# Altium PCB Pmodkypd.PcbDoc
Units mm, origin at the board's own origin, x right, y up, seen from the top; angles counter-clockwise.
Board outline 99.69 x 68.45 mm, 2 copper layers (Top Layer, Bottom Layer); 10 components, 14 nets, 36 pads, 13 vias.
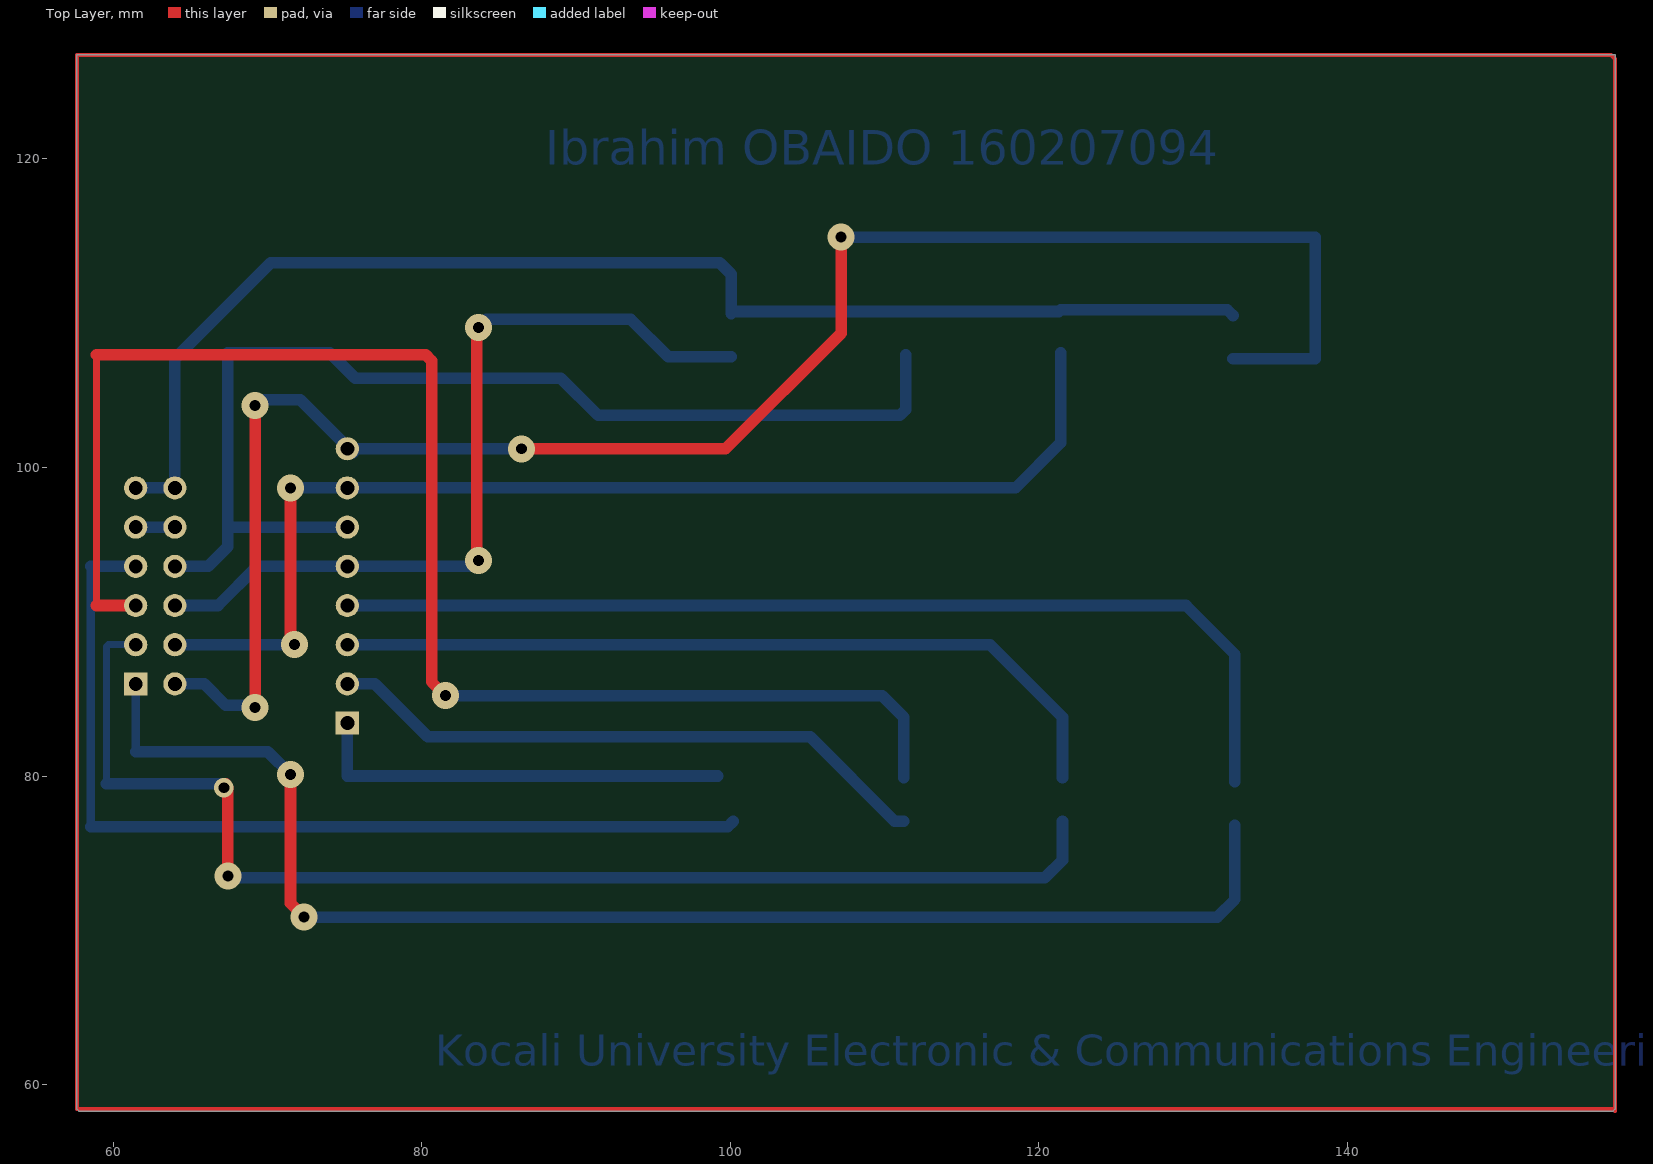
[diagram p0: Top Layer view]
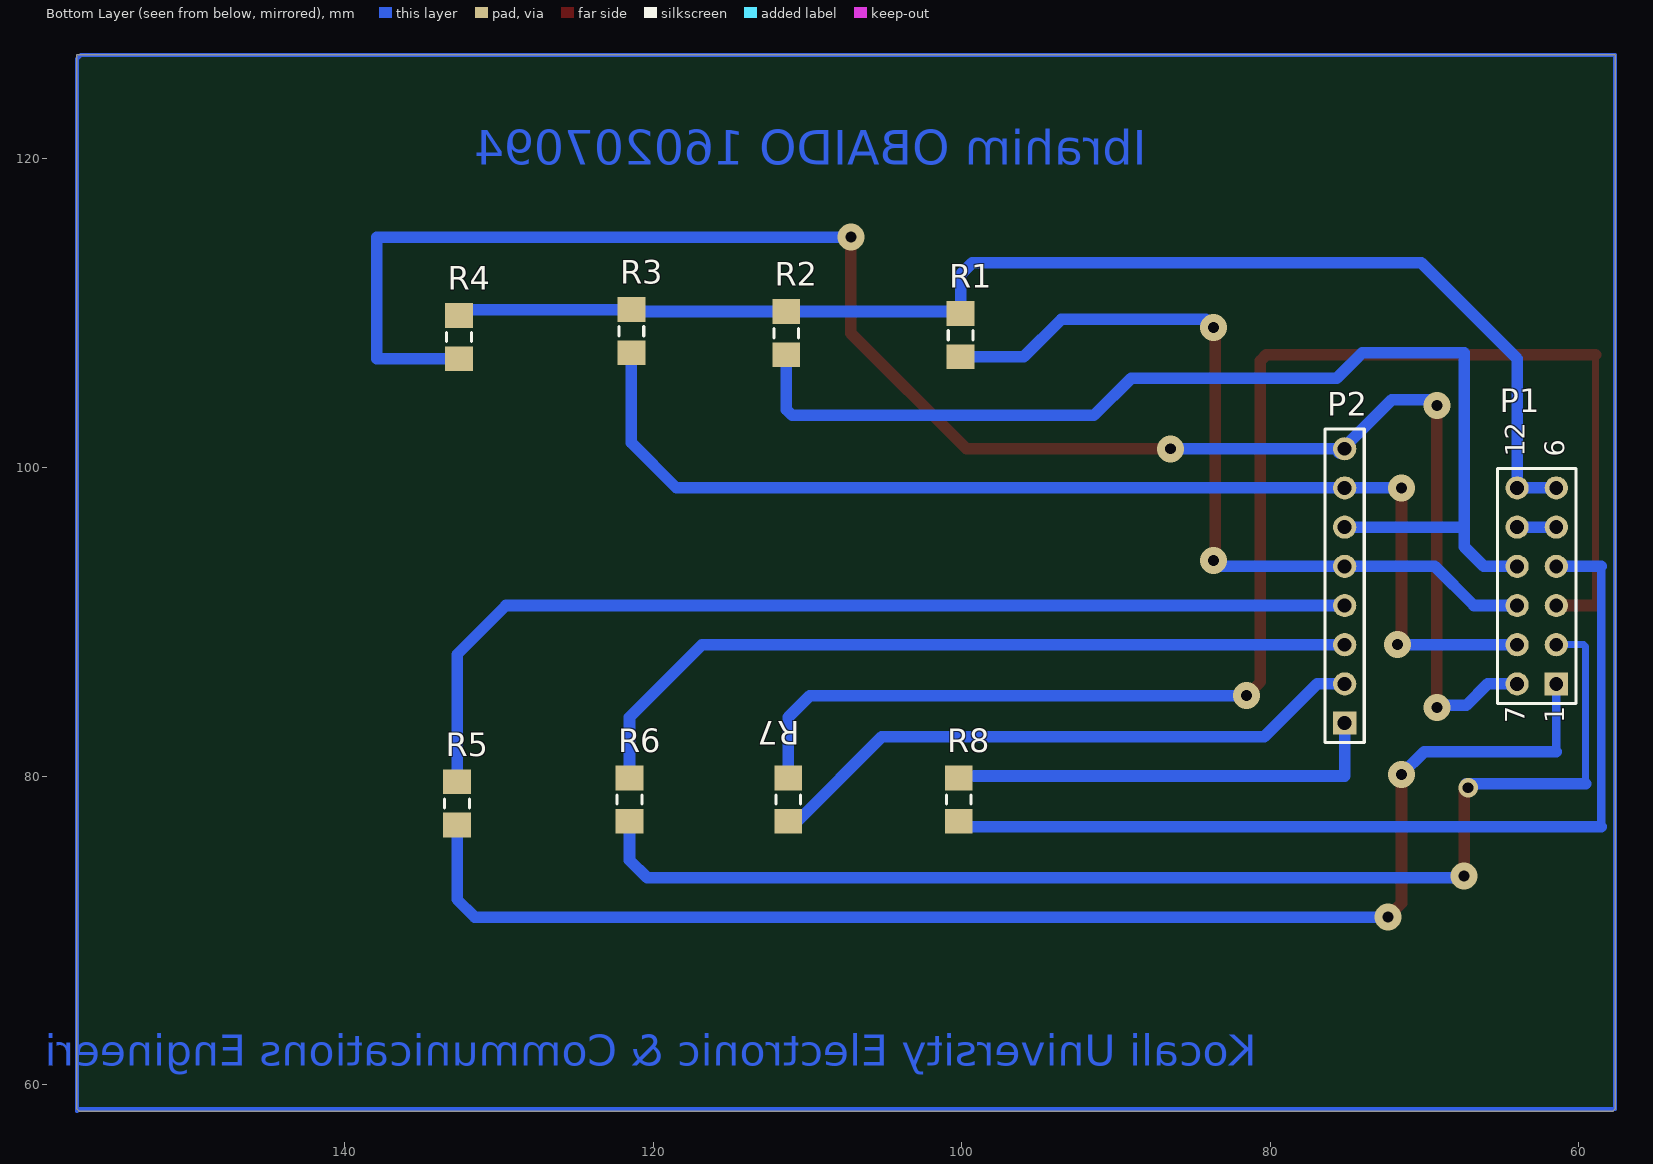
[diagram p1: Bottom Layer view, seen from below]

## Layer stack, top to bottom
Top Solder: solder mask 0.0102, Solder Resist, Dk 3.5
Top Layer: signal copper 0.0356
Dielectric 1: dielectric 0.32, FR-4, Dk 4.8
Bottom Layer: signal copper 0.0356
Bottom Solder: solder mask 0.0102, Solder Resist, Dk 3.5

## Board outline
57.785,58.293 57.658,58.42 57.658,126.746 157.353,126.746 157.353,58.42 157.226,58.293

## Design rules (kind name [scope] priority, off if disabled: settings)
Clearance [All] p1: gap=0.254 ignorepadtopadclearanceinfootprint=FALSE except(0: Arc-Hole Track-Hole SMDPad-Hole THPad-Hole Via-Hole Fill-Hole Poly-Hole Region-Hole Text-Hole)
PolygonConnect [All] p1: connectstyle=Relief reliefconductorwidth=0.254 reliefentries=4 polygonreliefangle="90 Angle" airgapwidth=0.254
RoutingVias [All] p1: holewidth=0.711 width=1.27 viastyle="Through Hole" minholewidth=0.711 minwidth=1.27 maxholewidth=0.711 maxwidth=1.27
SolderMaskExpansion [All] p1: expansion=0.102 istentingtop=FALSE
Width [All] p1: maxlimit=0.95 minlimit=0.45 preferedwidth=0.75 minimp=50.000000 maximp=50.000000 favimp=50.000000
30 further rules are at their usual default settings.

## Classes and differential pairs
component class Pmodkypd: R1 R2 R3 R4 R5 R6 R7 R8

## Components (designator, comment, footprint, x,y, rotation, side; value= is the part's Value field where it differs from the comment)
P1 "Header 6X2A" HDR2X6_CEN 61.468,85.979 r90 bottom
P2 "Header 8" HDR1X8 75.184,83.439 r90 bottom
R1 "ERJP08J" 8-1206 100.076,108.585 r90 bottom
R2 "ERJP08J" 8-1206 111.379,108.715 r90 bottom
R3 "ERJP08J" 8-1206 121.412,108.842 r90 bottom
R4 "ERJP08J" 8-1206 132.588,108.458 r90 bottom
R5 "ERJP08J" 8-1206 132.715,78.229 r90 bottom
R6 "ERJP08J" 8-1206 121.539,78.483 r90 bottom
R7 "ERJP08J" 8-1206 111.252,78.483 r270 bottom
R8 "ERJP08J" 8-1206 100.203,78.483 r90 bottom

## Footprints (in the part's own frame and the unit in brackets; to place one, negate y for a bottom-side part, rotate by r counter-clockwise, add the part's x,y. Pads: shape width x height; smd on the part's side, far side on the other; paste and mask are expansions set on the pad)
8-1206 [mm] "Chip Resistor; Body 3.1 x 1.6 mm (LxW typ)"
  rect 1.6x1.8 smd: 1(-1.4,0) 2(1.4,0)
  silkscreen extent -0.3,-0.8 0.3,0.8
HDR1X8 [mm] "Connector; Header; 8 Position"
  rect 1.5x1.5 hole 0.9: 1(0,0)
  round 1.5 hole 0.9: 2(2.54,0) 3(5.08,0) 4(7.62,0) 5(10.16,0) 6(12.7,0) 7(15.24,0) 8(17.78,0)
  silkscreen extent -1.27,-1.27 19.05,1.27
HDR2X6_CEN [mm] "Connector; Header; 6x2 Position"
  rect 1.5x1.5 hole 0.9: 1(0,0)
  round 1.5 hole 0.9: 2(2.54,0) 3(5.08,0) 4(7.62,0) 5(10.16,0) 6(12.7,0) 7(0,2.54) 8(2.54,2.54) 9(5.08,2.54) 10(7.62,2.54) 11(10.16,2.54) 12(12.7,2.54)
  silkscreen extent -1.27,-1.27 13.97,3.81

## Part data
P1: "Header, 6-Pin, Dual row", LatestRevisionDate=17-Jul-2002, LatestRevisionNote="Re-released for DXP Platform.", Publisher="Altium Limited"
P2: "Header, 8-Pin", LatestRevisionDate=17-Jul-2002, LatestRevisionNote="Re-released for DXP Platform.", Publisher="Altium Limited"
R1 R2 R3 R4 R5 R6 R7 R8: "Anti-Surge Thick Film Chip Resistor, 10 Ohm to 1M Ohm Range, 5% Tolerance, 1206 Size, 0.25 W", PackageDocument=Mar-2003, Code_IPC="3216 [1206]", ComponentLink1Description="Manufacturer Link", ComponentLink1URL=http://www.panasonic.com/industrial/components/resistive_products.htm, ComponentLink2Description=Datasheet, ComponentLink2URL=http://www.panasonic.com/industrial/components/pdf/AOA0000CE4.pdf, LatestRevisionDate=19-Mar-2004, LatestRevisionNote="Silkscreen size reduced.", Note="If flow soldering, adjust pad width of PCB Footprint to 0.7 - 0.8 times the width of the resistor.", PackageReference=8-1206, Published=17-Dec-2003, Publisher="Altium Limited"

## Via types
v1: diameter 1.75, hole 0.711, Top Layer to Bottom Layer, 12 vias
v2: diameter 1.27, hole 0.711, Top Layer to Bottom Layer, 1 vias

## Nets (pads, with @x,y where several pads share a name; then routed paths per layer and width w, separated by ;. In a path a pad name is that pad's centre, name@x,y a point inside that pad or via, vN(x,y) a via of type N, cw(c..) or ccw(c..) an arc to the next point about the centre after c; other vN are vias at no path point)
GND: P1.5 P1.11 | length 2.5
  Bottom Layer w0.75: P1.5 P1.11
NetP1_1: P1.1 R5.1 | length 90.3
  Top Layer w0.75: v1(71.501,80.113) 71.501,71.755 v1(72.39,70.866)
  Bottom Layer w0.55: 61.468,81.582 P1.1
  Bottom Layer w0.75: 61.468,81.582 70.032,81.582 v1(71.501,80.113) ; v1(72.39,70.866) 131.572,70.866 132.715,72.009 R5.1
NetP1_2: P1.2 R6.1 | length 81.6
  Top Layer w0.75: v2@67.31,79.502 67.31,79.375 67.437,79.248 v1(67.437,73.533)
  Bottom Layer w0.45: 59.563,79.502 59.563,88.392 ; 59.69,88.519 P1.2
  Bottom Layer w0.75: 59.563,79.502 v2@67.31,79.502 ; v1(67.437,73.533) 67.564,73.406 120.396,73.406 121.539,74.549 R6.1
  other v2: 67.183,79.248
NetP1_3: P1.3 R7.1 | length 97
  Top Layer w0.45: 58.928,91.059 58.928,107.315
  Top Layer w0.75: 58.928,91.059 P1.3 ; 58.928,107.315 80.264,107.315 80.645,106.934 80.645,86.106 v1(81.534,85.217)
  Bottom Layer w0.75: v1(81.534,85.217) 109.855,85.217 111.252,83.82 R7.1
NetP1_4: P1.4 R8.1 | length 61.6
  Bottom Layer w0.55: 58.547,76.708 58.547,93.599
  Bottom Layer w0.75: 58.547,76.708 99.828,76.708 R8.1 ; 58.547,93.599 P1.4
NetP1_7: P1.7 P2.8 R4.1 | length 118.6
  Top Layer w0.75: v1(69.215,104.013) 69.215,84.709 v1@69.342,84.582 ; v1(86.487,101.219) 99.695,101.219 107.188,108.712 v1(107.188,114.935)
  Bottom Layer w0.75: P1.7 65.913,85.979 67.31,84.582 v1@69.342,84.582 ; v1(69.215,104.013) 69.596,104.394 72.136,104.394 P2.8@75.311,101.219 ; P2.8 P2.8@75.311,101.219 ; P2.8@75.565,100.965 P2.8@75.311,101.219 ; v1(86.487,101.219) P2.8@75.311,101.219 ; v1(107.188,114.935) 137.922,114.935 137.922,107.058 R4.1
  other v1: 69.215,84.455
NetP1_8: P1.8 P2.7 R3.1 | length 75
  Top Layer w0.75: v1(71.501,98.679) 71.501,88.773 v1(71.755,88.519)
  Bottom Layer w0.75: P1.8 v1(71.755,88.519) ; v1(71.501,98.679) P2.7 118.491,98.679 121.412,101.6 R3.1
NetP1_9: P1.9 P2.5 R1.1 | length 53.7
  Top Layer w0.75: v1(83.693,93.98) 83.566,94.107 83.566,108.966 v1(83.693,109.093)
  Bottom Layer w0.75: P1.9 66.802,91.059 69.342,93.599 P2.5 83.312,93.599 v1(83.693,93.98) ; v1(83.693,109.093) 84.201,109.601 93.564,109.601 95.98,107.185 R1.1
NetP1_10: P1.10 P2.6 R2.1 | length 73.6
  Bottom Layer w0.75: P1.10 66.167,93.599 67.437,94.869 67.437,96.139 ; P2.6 67.437,96.139 ; R2.1 111.379,103.759 110.998,103.378 91.44,103.378 89.027,105.791 75.692,105.791 74.041,107.442 67.437,107.442 67.437,96.139
NetP2_1: P2.1 R8.2 | length 27.4
  Bottom Layer w0.75: P2.1 75.184,80.01 99.187,80.01
NetP2_2: P2.2 R7.2 | length 39.8
  Bottom Layer w0.75: P2.2 76.962,85.979 80.391,82.55 105.181,82.55 110.648,77.083 R7.2
NetP2_3: P2.3 R6.2 | length 52.2
  Bottom Layer w0.75: P2.3 116.84,88.519 121.539,83.82 R6.2
NetP2_4: P2.4 R5.2 | length 67.1
  Bottom Layer w0.75: P2.4 129.54,91.059 132.715,87.884 R5.2
VCC: P1.6 P1.12 R1.2 R2.2 R3.2 R4.2 | length 85.2
  Bottom Layer w0.75: P1.6 P1.12 64.008,107.061 70.231,113.284 99.314,113.284 100.076,112.522 R1.2 100.206,110.115 R2.2 121.285,110.115 R3.2 132.204,110.242 R4.2

## Other copper
Bottom Layer:
  text "Ibrahim OBAIDO 160207094" at 88.011,119.634 h2.25
  text "Kocali University Electronic & Communications Engineering" at 80.899,61.214 h2
Multi-Layer:
  lines w0.254: 57.658,58.42 57.658,126.746 157.099,126.746 157.353,126.492 157.353,58.293 157.226,58.42 57.658,58.42
  text "X" at 154.94,124.079 h1.75
  text "X" at 58.801,123.952 h1.75
  text "X" at 154.813,59.563 h1.75
  text "X" at 58.801,59.436 h1.75

## Text inside footprints (layer, text, board x,y; h text height)
P1: Bottom Overlay "12" at 63.5,100.711 h1.27 r270; Bottom Overlay "6" at 60.96,100.711 h1.27 r270; Bottom Overlay "1" at 60.96,83.439 h1.27 r270; Bottom Overlay "7" at 63.5,83.439 h1.27 r270